# Altium PCB PCB_CL-RMS-01.PcbDoc
Units mil, origin at the board's own origin, x right, y up, seen from the top; angles counter-clockwise.
Board outline 2375 x 1655 mil, 2 copper layers (Top Layer, Bottom Layer); 37 components, 27 nets, 109 pads, 5 vias.
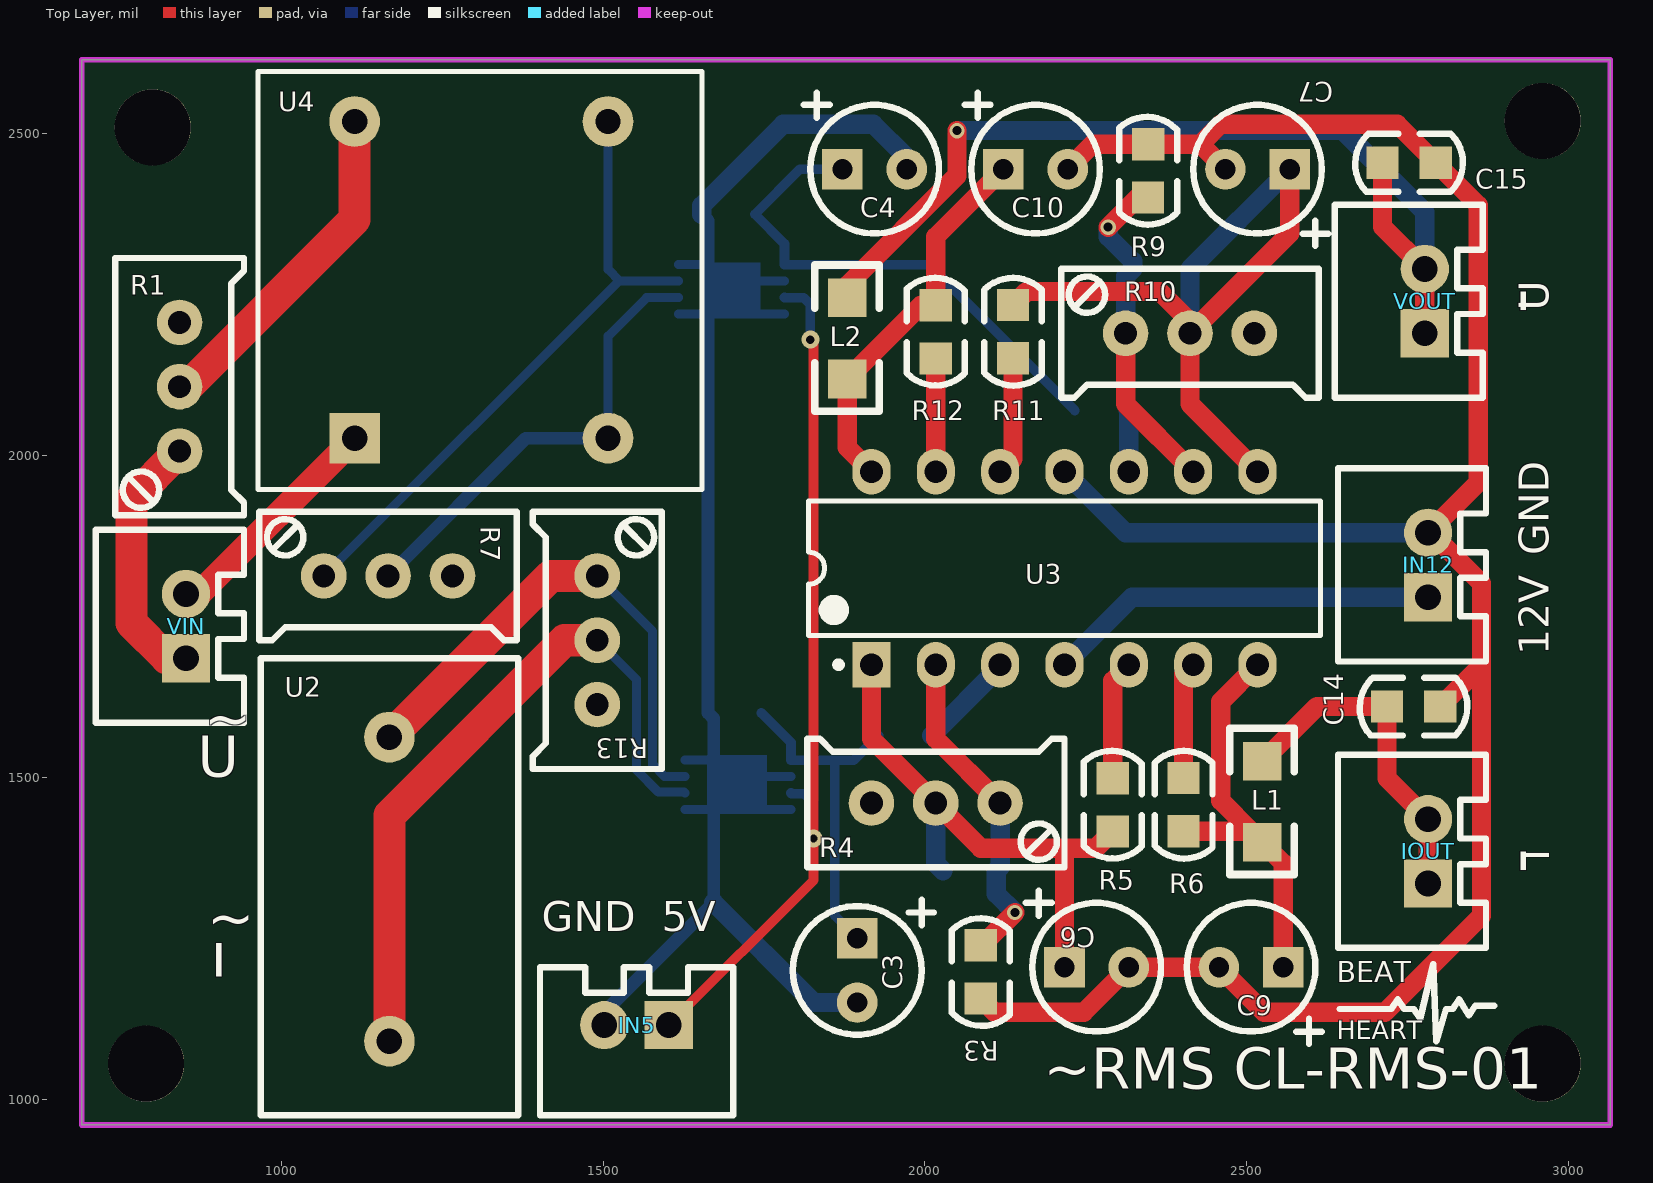
[diagram p0: Top Layer view]
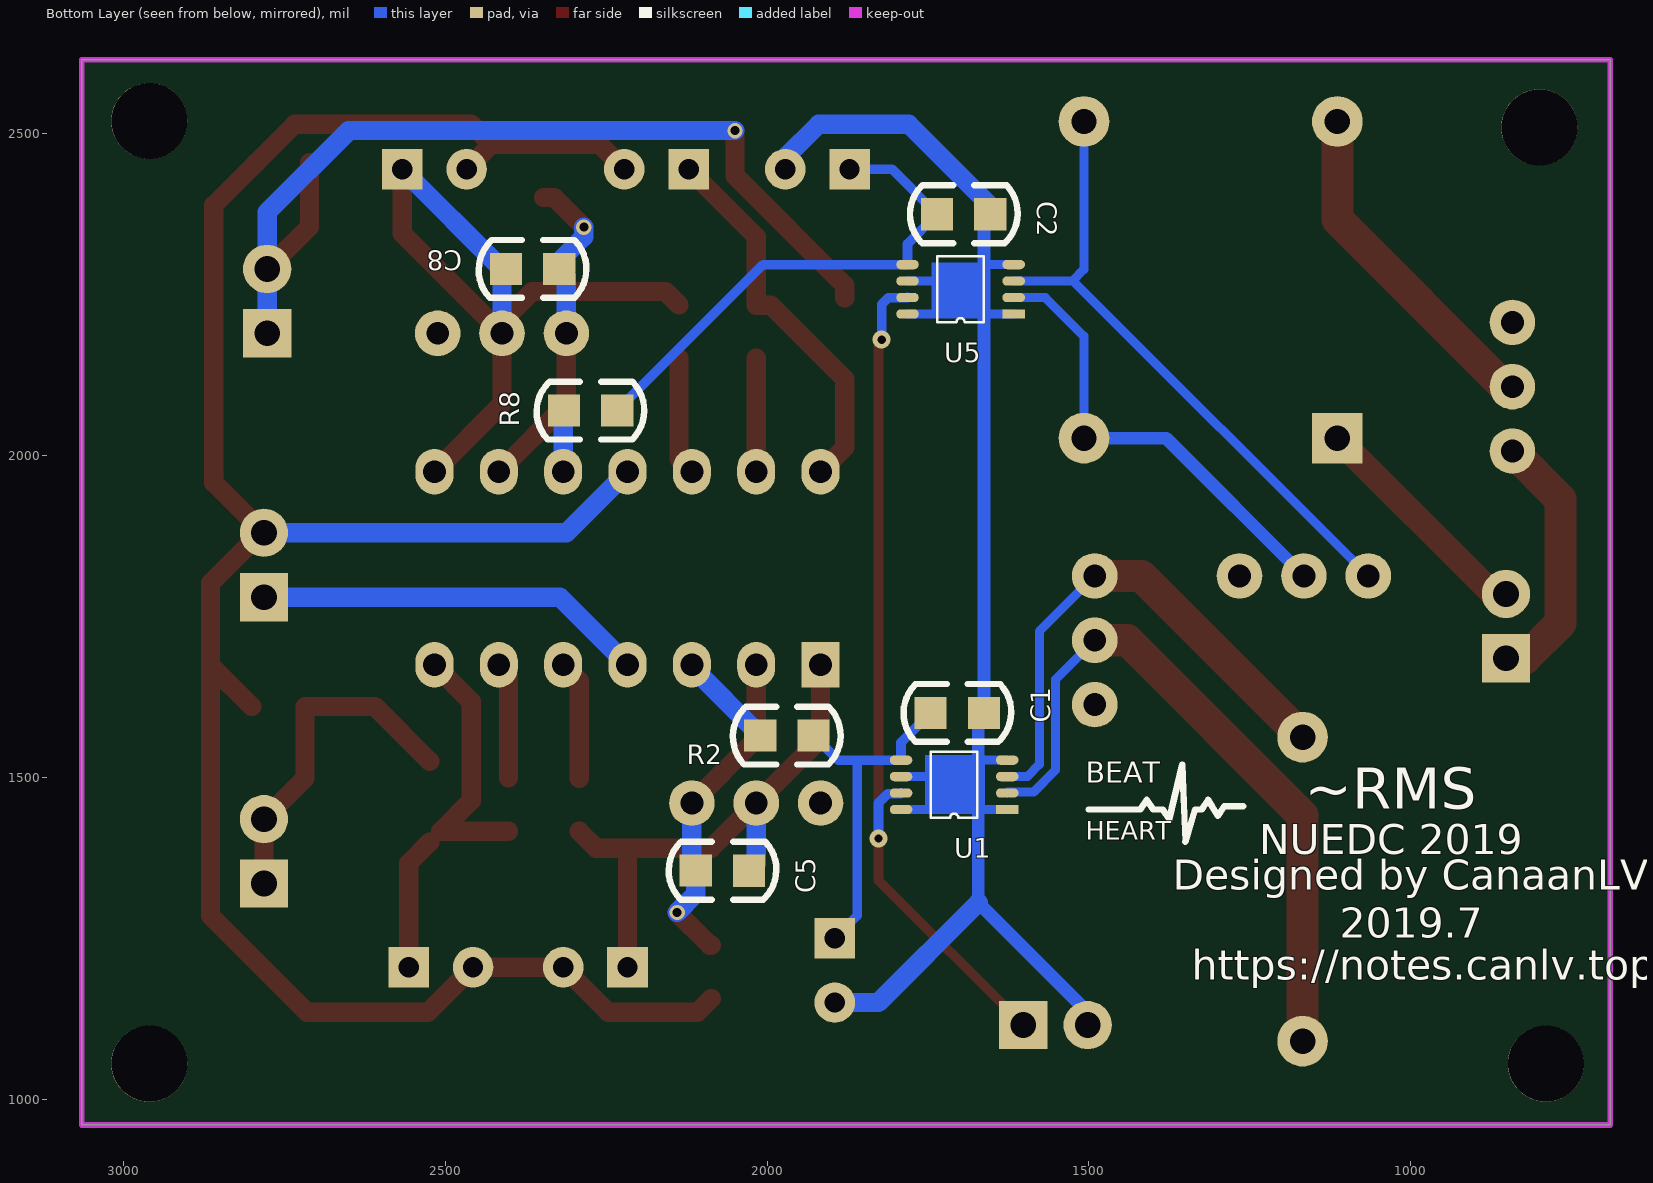
[diagram p1: Bottom Layer view, seen from below]
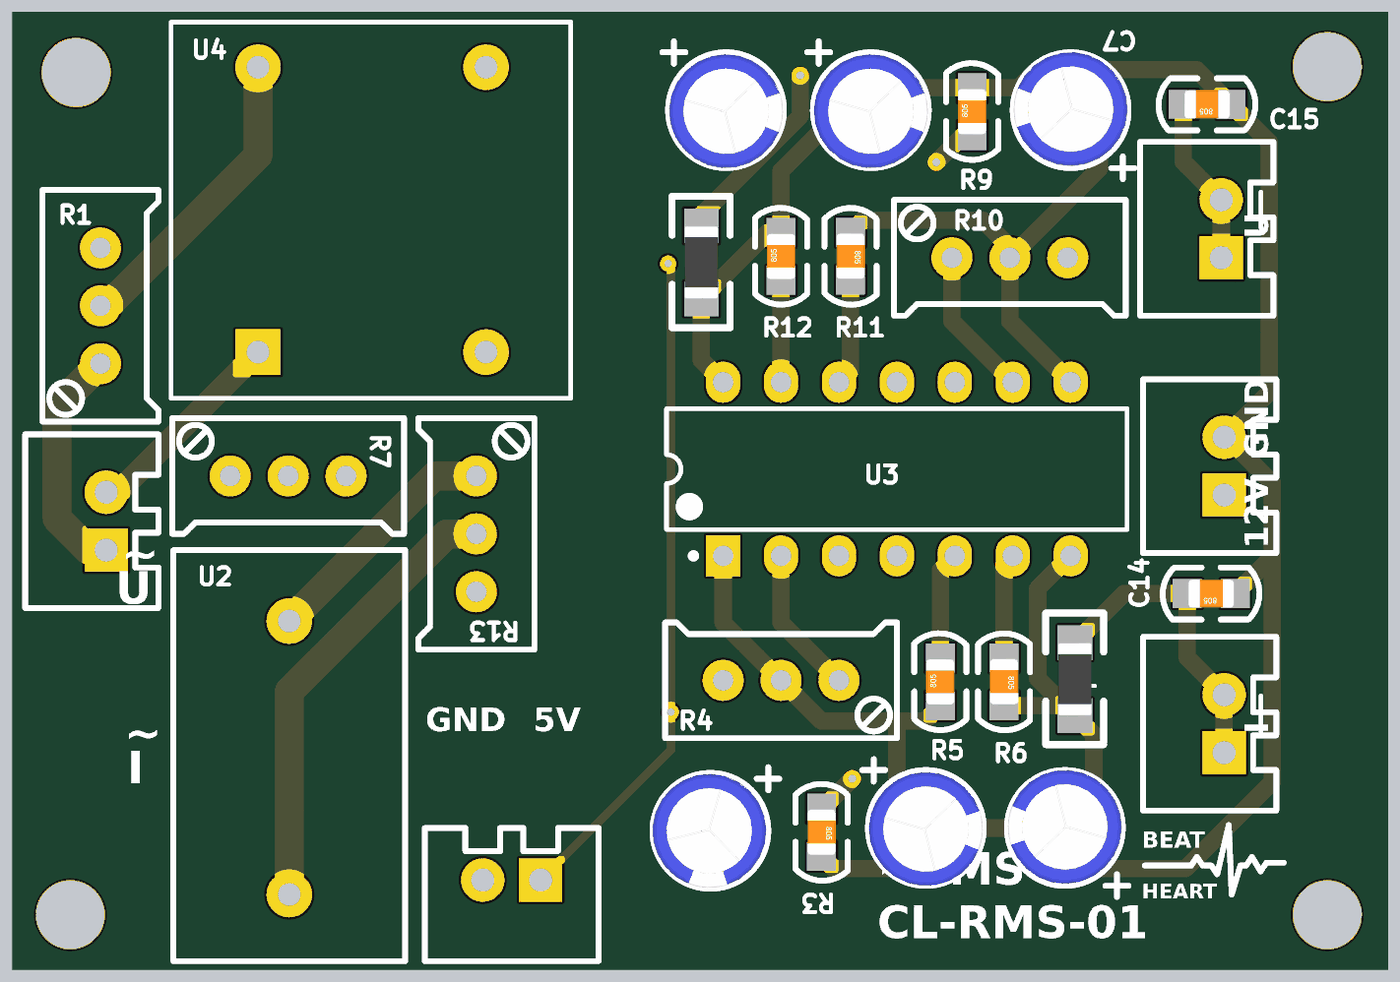
[diagram p2: 3D render of the assembled board from above, using the file's embedded part models]
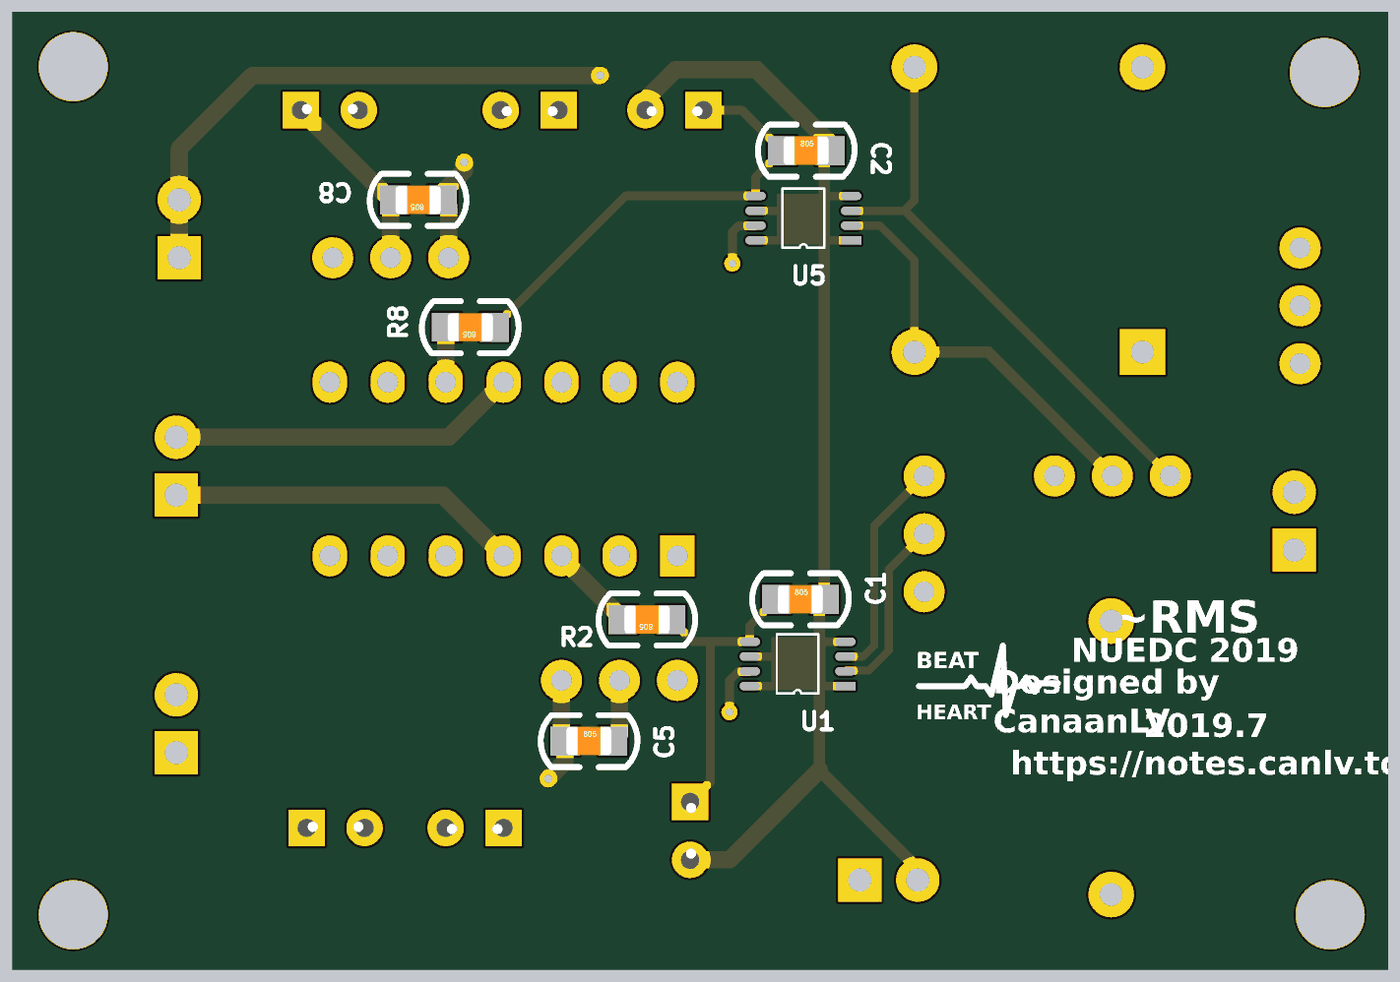
[diagram p3: 3D render of the assembled board from below, using the file's embedded part models]

## Layer stack, top to bottom
Top Solder: solder mask 0.4, Solder Resist, Dk 3.5
Top Layer: signal copper 1.4
Dielectric 1: dielectric 12.6, FR-4, Dk 4.8
Bottom Layer: signal copper 1.4
Bottom Solder: solder mask 0.4, Solder Resist, Dk 3.5

## Board outline
690,960 690,2615 3065,2615 3065,960

## Design rules (kind name [scope] priority, off if disabled: settings)
BoardOutlineClearance [All] p1: gap=7.87
Clearance [All] p1: gap=5 except(0: Arc-Text Track-Text Fill-Text Poly-Text Region-Text Text-Text; 3.5: SMDPad-Text THPad-Text Via-Text; 5.98: Arc-Via Track-Via THPad-Fill THPad-Poly THPad-Region Via-Fill Via-Poly Via-Region; 6: Arc-SMDPad Arc-THPad Track-SMDPad Track-THPad; 10: SMDPad-SMDPad SMDPad-THPad SMDPad-Via THPad-THPad THPad-Via Via-Via)
ComponentClearance [All] p1: gap=10 collisioncheckmode=3 verticalgap=10 showdistances=TRUE
DiffPairsRouting [All] p1: maxlimit=10 minlimit=6 mostfreqgap=10 toplayer_minwidth=5.98 toplayer_maxwidth=15 toplayer_prefwidth=15 bottomlayer_minwidth=5.98 bottomlayer_maxwidth=15 bottomlayer_prefwidth=15 maxuncoupledlength=500
HoleSize [All] p1: absolutevalues=TRUE maxlimit=23.62 minlimit=11.81 maxpercent=80.000 minpercent=20.000
MinimumSolderMaskSliver [All] p1: minsoldermaskwidth=1.97
PlaneConnect [All] p1: planeconnectstyle=Direct reliefexpansion=20 reliefentries=4 reliefconductorwidth=10 reliefairgap=10
PolygonConnect [All] p1: connectstyle=Direct reliefconductorwidth=10 reliefentries=4 polygonreliefangle="90 Angle" airgapwidth=10
RoomDefinition Sheet_CL-RMS-01 [InComponentClass('Sheet3')] p1: confinementstyle=ConfineIn formatcopy=TRUE lockcomponents=FALSE outline 690,960 3065,960 3065,2615 690,2615
RoutingVias [All] p1: holewidth=15.75 width=27.56 viastyle="Through Hole" minholewidth=11.81 minwidth=23.62 maxholewidth=248.03 maxwidth=275.59
SilkToSilkClearance [All] p1: silktosilkclearance=5
SilkToSolderMaskClearance [IsPad] p1: minsilkscreentomaskgap=3.5 clearancetoexposedcopper=FALSE
SolderMaskExpansion [All] p1: expansion=4
Width [All] p1: maxlimit=80 minlimit=5 preferedwidth=10
23 further rules are at their usual default settings.

## Components (designator, comment, footprint, x,y, rotation, side; value= is the part's Value field where it differs from the comment)
C1 "普通电容" C0805 1752,1600 r180 bottom
C2 "普通电容" C0805 1742,2375 r180 bottom
C3 "电解电容" CZ0.50/25V47U 1895,1250 r180 top
C4 "电解电容" CZ0.50/25V47U 1872,2445 r270 top
C5 "普通电容" C0805 2117,1355 r180 bottom
C6 "电解电容" CZ0.50/25V47U 2217,1205 r270 top
C7 "电解电容" CZ0.50/25V47U 2567,2445 r90 top
C8 "普通电容" C0805 2317,2290 r0 bottom
C9 "电解电容" CZ0.50/25V47U 2557,1205 r90 top
C10 "电解电容" CZ0.50/25V47U 2122,2445 r270 top
C14 "普通电容" C0805 2807,1610 r180 top
C15 "普通电容" C0805 2800,2455 r180 top
IN5 "CON2" P2 1552,1115 r180 top
IN12 "CON2" P2 2782,1830 r90 top
IOUT "CON2" P2 2782,1385 r90 top
L1 "" L1206 2527,1470 r90 top
L2 "" L1206 1882,2190 r90 top
R1 "RES" W1 842,2007 r90 top
R2 "RES" C0805 1922,1565 r0 bottom
R3 "RES" C0805 2087,1245 r270 top
R4 "RES" W1 2117,1460 r180 top
R5 "RES" C0805 2292,1410 r90 top
R6 "RES" C0805 2402,1505 r270 top
R7 "RES" W1 1491,1813 r270 top
R8 "RES" C0805 2227,2070 r0 bottom
R9 "RES" C0805 2347,2395 r90 top
R10 "RES" W1 2312,2190 r0 top
R11 "RES" C0805 2137,2240 r270 top
R12 "RES" C0805 2017,2145 r90 top
R13 "RES" W1 1066,1813 r0 top
U1 "LTC1966" LTC1966 1627,1450 r0 bottom
U2 "DL-CT03C1.0" DL-CT03C1.0 1168,1090 r90 top
U3 "LM124" DIP-14 2217,1825 r90 top
U4 "STP204A" STP204A 1114,2027 r90 top
U5 "LTC1966" LTC1966 1617,2220 r0 bottom
VIN "CON2" P2 852,1735 r90 top
VOUT "CON2" P2 2777,2240 r90 top

## Footprints (in the part's own frame and the unit in brackets; to place one, negate y for a bottom-side part, rotate by r counter-clockwise, add the part's x,y. Pads: shape width x height; smd on the part's side, far side on the other; paste and mask are expansions set on the pad)
C0805 [mil]
  rect 50x50 smd: 1(6,0) 2(88.7,-0.1)
  silkscreen extent -36,-45 131,45, body extent 8,-25 87,25, height 30
CZ0.50/25V47U [mm]
  rect 1.6x1.6 hole 0.8: 1(0,0)
  round 1.6 hole 0.8: 2(0,2.54)
  silkscreen extent -3.02,-1.52 2.54,3.81, body extent -2.45,-1.23 2.54,3.77, height 7.3
DIP-14 [mm] "DIP; 14 Leads; Row Spacing 7.62 mm; Pitch 2.54 mm"
  rect 1.8x1.5 hole 0.9: 1(-3.81,7.62)
  oval 1.8x1.5 hole 0.9: 2(-3.81,5.08) 3(-3.81,2.54) 4(-3.81,0) 5(-3.81,-2.54) 6(-3.81,-5.08) 7(-3.81,-7.62) 8(3.81,-7.62) 9(3.81,-5.08) 10(3.81,-2.54) 11(3.81,0) 12(3.81,2.54) 13(3.81,5.08) 14(3.81,7.62)
  silkscreen extent -3.93,-10.1 2.65,10.1, body extent -3.6,-10.1 3.6,10.1, height 5.08
DL-CT03C1.0 [mm]
  round 2 hole 1: 1(0,0) 2(12,0)
  silkscreen extent -2.92,-5.08 15.11,5.08
L1206 [mil] "1/4W"
  rect 60x60 smd: 1(-70.98,2.53) 2(55,2.53)
  silkscreen extent -121,-47 106,53, body extent -71,-27 55,32, height 63
LTC1966 [mil]
  rect 35x14.54 smd: 1(0,0)
  oval 35x14.54 smd: 2(0,-25.59) 3(0,-51.18) 4(0,-76.77) 5(164.92,-76.77) 6(164.92,-51.18) 7(164.92,-25.59) 8(164.92,0)
  silkscreen extent 46,-90 118,13
P2 [mil]
  rect 75x75 hole 40: 1(-50,0)
  round 75 hole 40: 2(50,0)
  silkscreen extent -150,-90 150,140
STP204A [mm]
  rect 2x2 hole 1: 1(0,0)
  round 2 hole 1: 2(12.5,0) 3(0,-10) 4(12.5,-10)
  silkscreen extent -2.03,-13.72 14.48,3.81
W1 [mm] "3296"
  round 1.8 hole 0.9: 1(0,0) 2(2.54,0) 3(5.08,0)
  silkscreen extent -2.54,-2.54 7.62,2.54

## Part data
C1 C2 C3 C4 C5 C6 C7 C8 C9 C10 C14 C15: "Capacitor"
IN5 IN12 IOUT VIN VOUT: "Connector"
L1 L2: library part 贴片电感

## Free pads (board coordinates)
  round 118.11 hole 118.11: 2(800,2510) 3(790,1055) 4(2960,2520) 5(2960,1055)

## Via types
v1: diameter 24, hole 14, Top Layer to Bottom Layer, 3 vias
v2: diameter 28, hole 13, Top Layer to Bottom Layer, 2 vias

## Nets (pads, with @x,y where several pads share a name; then routed paths per layer and width w, separated by ;. In a path a pad name is that pad's centre, name@x,y a point inside that pad or via, vN(x,y) a via of type N, cw(c..) or ccw(c..) an arc to the next point about the centre after c; other vN are vias at no path point)
5V: IN5.1 U1.7 U5.7 | length 1356.4
  Top Layer w15: IN5.1 1827,1340 v2(1827,1405) 1827,2175 v2(1822,2180)
  Bottom Layer w15: U5.7 1782.51,2245 1812,2245 1822,2235 v2(1822,2180) ; U1.7 1792.74,1474.77 1812.41,1474.77 1826.92,1460.26 1826.92,1460.08 1827,1460 v2(1827,1405)
12V: IN12.1 U3.4 | length 608.5
  Bottom Layer w30: U3.4 2322,1780 IN12.1
GND_5V: C1.2 C2.2 C3.2 C4.2 IN5.2 U1.1 U1.4 U1.6 U1.8 U5.1 U5.4 U5.6 U5.8 | length 2712.1
  Bottom Layer w14: U5.1 1663.3,2220 U5.8 ; U5.4 1661.53,2296.77 1663.3,2295 ; U1.1 1672,1450 U1.8 ; U1.4 1668.77,1526.77 1672,1530 ; 1663.3,2270 1664.48,2271.18 U5.6 ; 1672,1500 1673.18,1501.18 U1.6
  Bottom Layer w20: IN5.2 1502,1135 1672,1305 1672,1450 1672,1500 1672,1530 1672,1591.2 C1.2 1663.3,2220 1663.3,2270 1663.3,2295 1663.3,2364.9 C2.2
  Bottom Layer w30: C2.2 1653.3,2388.3 1780,2515 1920,2515 1972,2463 C4.2 ; 1672,1305 1827,1150 C3.2
GND_12V: C6.2 C7.2 C9.2 C10.2 C14.1 C15.1 IN12.2 R3.2 R9.2 U3.11 | length 3549.3
  Top Layer w30: R3.2 2108.2,1135 2247,1135 C6.2 C9.2 2527,1135 2715,1135 2865,1285 2865,1674 ; C10.2 2260.7,2483.7 R9.2 2428.3,2483.7 ; C7.2 2428.3,2483.7 ; C14.1 2865,1674 ; 2428.3,2483.7 2459.6,2515 2734,2515 C15.1 2860,2389 2860,1958 IN12.2 2786.7,1880 2865,1801.7 2865,1674
  Bottom Layer w30: U3.11 2312,1880 IN12.2
IN1: R1.1 VIN.1 | length 405.8
  Top Layer w50: R1.1 767,1932 767,1740 822,1685 VIN.1
IN2: U4.1 VIN.2 | length 362.2
  Top Layer w40: VIN.2 872,1785 U4.1
IOUT: C14.2 IOUT.1 IOUT.2 L1.2 | length 530.6
  Top Layer w30: L1.2 2609.57,1610.1 C14.2 2718.3,1498.7 IOUT.2 IOUT.1
NetC1_1: C1.1 C3.1 R2.1 U1.5 | length 535.4
  Bottom Layer w15: C1.1 1791.92,1554.08 U1.5 1860,1526.77 ; C3.1 1860,1285 1860,1526.77 ; R2.1 1889.77,1526.77 1860,1526.77
NetC2_1: C2.1 C4.1 R8.1 U5.5 | length 807.3
  Bottom Layer w15: C4.1 1806,2445 C2.1 1781.92,2329.08 U5.5 2006.23,2296.77 R8.1
NetC5_1: C5.1 R3.1 R4.1 U3.2 | length 515
  Top Layer w30: U3.2 2017,1560 R4.1 ; R3.1 2089,1239 v1(2140,1290)
  Bottom Layer w30: R4.1 2117,1361 C5.1 2111,1319 v1(2140,1290)
NetC8_1: C8.1 R9.1 R10.1 U3.9 | length 524.8
  Top Layer w30: v1(2285,2355) 2331,2401 R9.1 ; R10.1 2312,2080 U3.9
  Bottom Layer w30: v1(2285,2355) 2285,2340 2323,2302 C8.1 2312,2279 R10.1
NetC9_1: C9.1 L1.1 R6.2 U3.7 | length 614.6
  Top Layer w30: R6.2 2507.19,1416.3 2460,1463.49 2460,1618 U3.7 ; L1.1 2557,1366.49 C9.1
NetC10_1: C10.1 L2.1 R12.2 U3.14 | length 599.4
  Top Layer w30: U3.14 1879.47,2012.53 L2.1 1994.16,2233.7 R12.2 2017.1,2340.1 C10.1
NetR1_2: R1.2 U4.2 | length 531.8
  Top Layer w50: R1.2 854,2107 1114,2367 U4.2
NetR2_2: R2.2 U3.3 | length 153.9
  Bottom Layer w30: R2.2 2117,1671.4 U3.3
NetR5_2: R5.2 U3.5 | length 186.6
  Top Layer w30: R5.2 2292.1,1650.1 U3.5
NetR6_1: R6.1 U3.6 | length 182.2
  Top Layer w30: R6.1 2402,1660 U3.6
NetR7_1: R7.1 U1.3 U2.2 | length 813.2
  Top Layer w50: U2.2 1418.56,1813 R7.1
  Bottom Layer w14: R7.1 1577,1727 1577,1520 1595.82,1501.18 U1.3
NetR7_2: R7.2 U1.2 U2.1 | length 1124.6
  Top Layer w50: U2.1 1168,1441 1440,1713 R7.2
  Bottom Layer w10: U2.1 U2.1@1168,1111
  Bottom Layer w14: R7.2 1552,1652 1552,1511.06 1586.15,1476.91 1625.68,1476.91 U1.2
NetR8_2: R8.2 U3.10 | length 95.6
  Bottom Layer w30: R8.2 2317,2068.8 U3.10
NetR11_2: R11.2 U3.12 | length 184.5
  Top Layer w30: U3.12 2136.9,1994.9 R11.2
NetR12_1: R12.1 U3.13 | length 176
  Top Layer w30: U3.13 R12.1
NetR13_1: R13.1 U4.4 U5.3 | length 995.8
  Bottom Layer w14: R13.1 1525,2272 ; U4.4 1507.7,2289.3 1525.82,2271.18 U5.3
NetR13_2: R13.2 U4.3 U5.2 | length 723.1
  Bottom Layer w14: U4.3 1507.7,2185.7 1567.59,2245.59 U5.2
  Bottom Layer w20: R13.2 1380,2027 U4.3
OUT1: C5.2 C6.1 R4.2 R5.1 U3.1 | length 866.8
  Top Layer w30: U3.1 1917,1560 R4.2 2087,1390 2215,1390 ; C6.1 2217,1388 2215,1390 ; R5.1 2266,1390 2215,1390
  Bottom Layer w30: R4.2 2017,1366.2 C5.2
OUT2: C7.1 C8.2 R10.2 R11.1 U3.8 | length 1218.1
  Top Layer w30: R11.1 2158,2255 2365,2255 2412,2208 R10.2 ; U3.8 2412,2080 R10.2 ; C7.1 2567,2345 R10.2
  Bottom Layer w30: R10.2 2412,2290 C7.1
VOUT: C15.2 L2.2 VOUT.1 VOUT.2 | length 1590.6
  Top Layer w30: L2.2 1879.47,2264.47 2050,2435 v1(2050,2505) ; C15.2 2711.3,2355.7 VOUT.2 VOUT.1
  Bottom Layer w30: v1(2050,2505) 2650,2505 2777,2378 VOUT.2 VOUT.1
pads on no net: R1.3 R4.3 R7.3 R10.3 R13.3

## Keep-outs
Keep-Out Layer:
  the board outline again, w9

## Other copper
Bottom Layer:
  rectangle net GND_5V: 1653.3,2220 1745,2300
  rectangle net GND_5V: 1661.53,1450 1755,1535

## Silkscreen, mask and mechanical layers (free items; w line width, h text height)
Top Overlay:
  lines w10: 2645,1140 2725,1140 2735,1155 2745,1140 2760,1140 2770,1125 2790,1210 2795,1090 2810,1140 2820,1140 2830,1155 2845,1130 2855,1145 2885,1145
  text "U" at 2985,2225 h80 r90
  text "-" at 2960,2220 h80 r90
  text "GND" at 2985,1845 h80 r90
  text "12V" at 2985,1690 h80 r90
  text "~" at 880,1540 h110
  text "U" at 870,1480 h110
  text "I" at 2985,1370 h80 r90
  text "-" at 2960,1350 h80 r90
  text "GND" at 1405,1245 h80
  text "5V" at 1591,1245 h80
  text "~" at 885,1230 h110
  text "BEAT" at 2640,1171 h55
  text "I" at 890,1170 h110
  text "HEART" at 2640,1083 h50
  text "~RMS CL-RMS-01" at 2185,995 h110
Bottom Overlay:
  lines w10: 1260,1455 1290,1455 1300,1440 1315,1465 1325,1450 1335,1450 1350,1400 1355,1520 1375,1435 1385,1450 1400,1450 1410,1465 1420,1450 1500,1450
  text "BEAT" at 1505,1481 h55
  text "~RMS" at 1165,1430 h110
  text "HEART" at 1505,1393 h50
  text "NUEDC 2019" at 1235,1365 h80
  text "Designed by CanaanLV" at 1370,1310 h80
  text "2019.7" at 1110,1235 h80
  text "https://notes.canlv.top/" at 1340,1170 h80